# Altium PCB Tx_555_PCB.PcbDoc
Units mm, origin at the board's own origin, x right, y up, seen from the top; angles counter-clockwise.
Board outline 75 x 50 mm, 2 copper layers (Top Layer, Bottom Layer); 32 components, 15 nets, 77 pads, 0 vias.
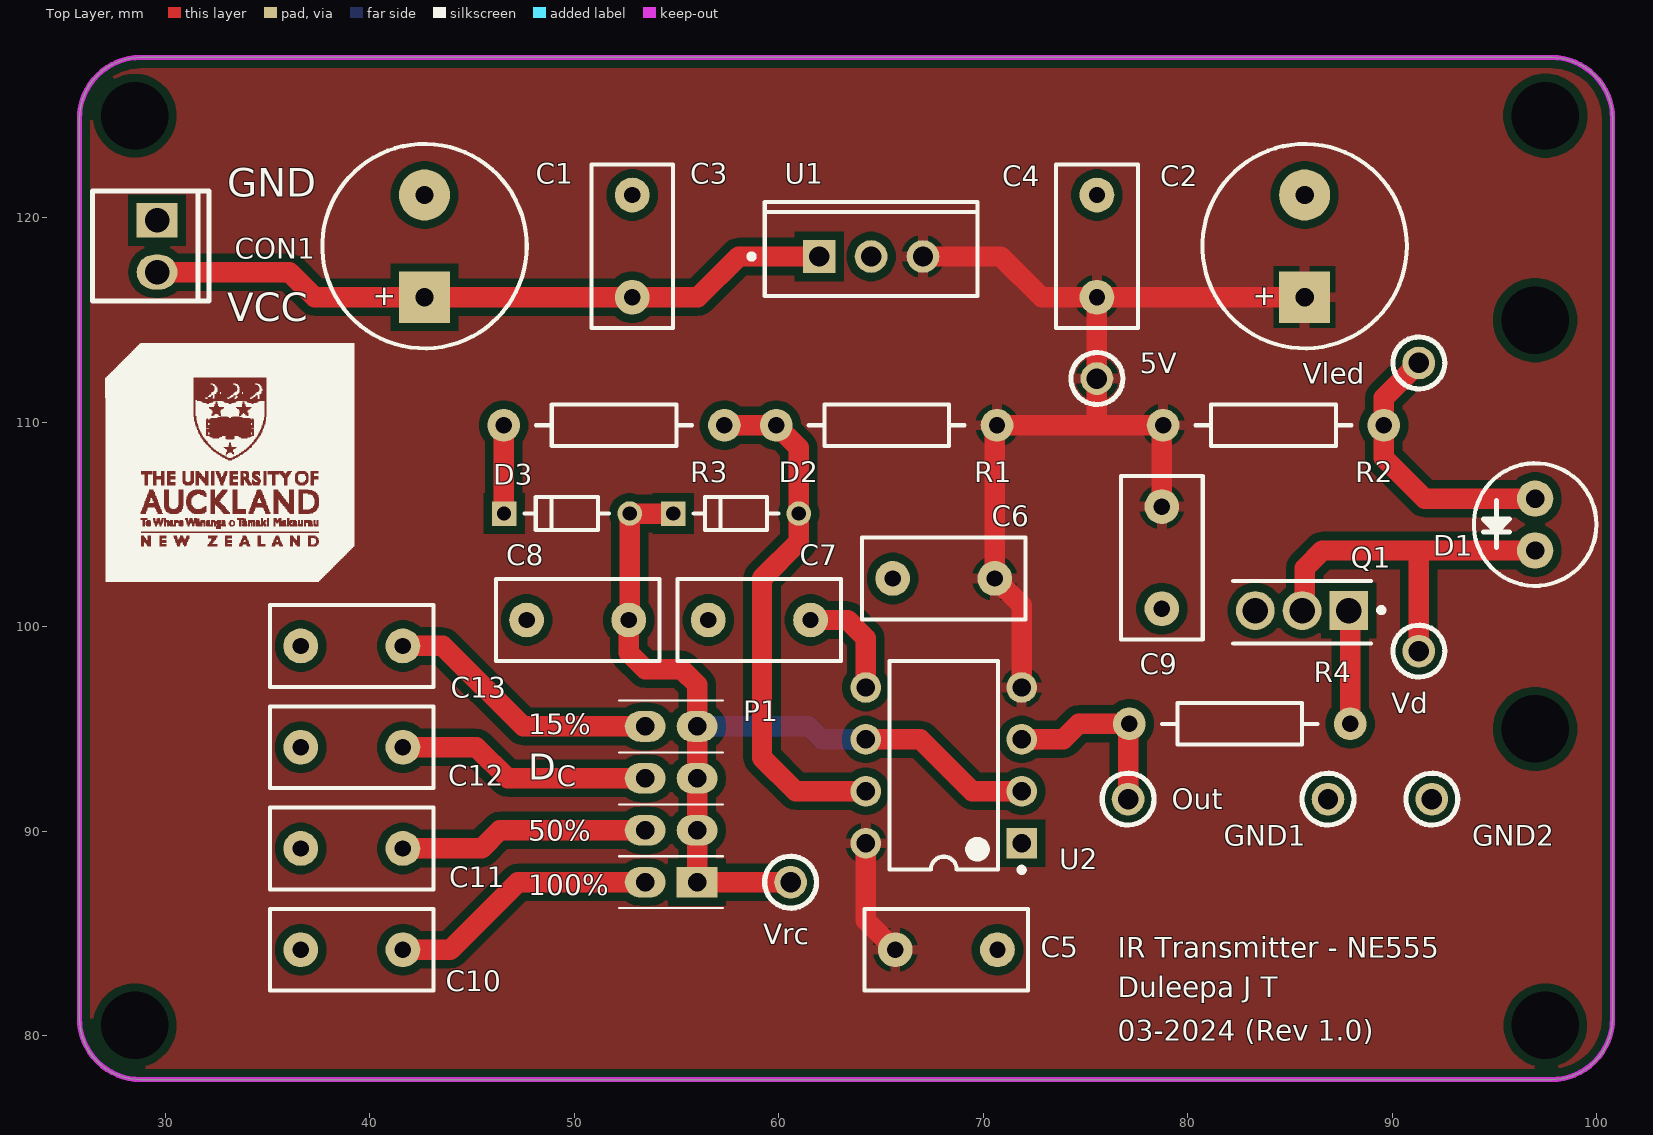
[diagram p0: Top Layer view]
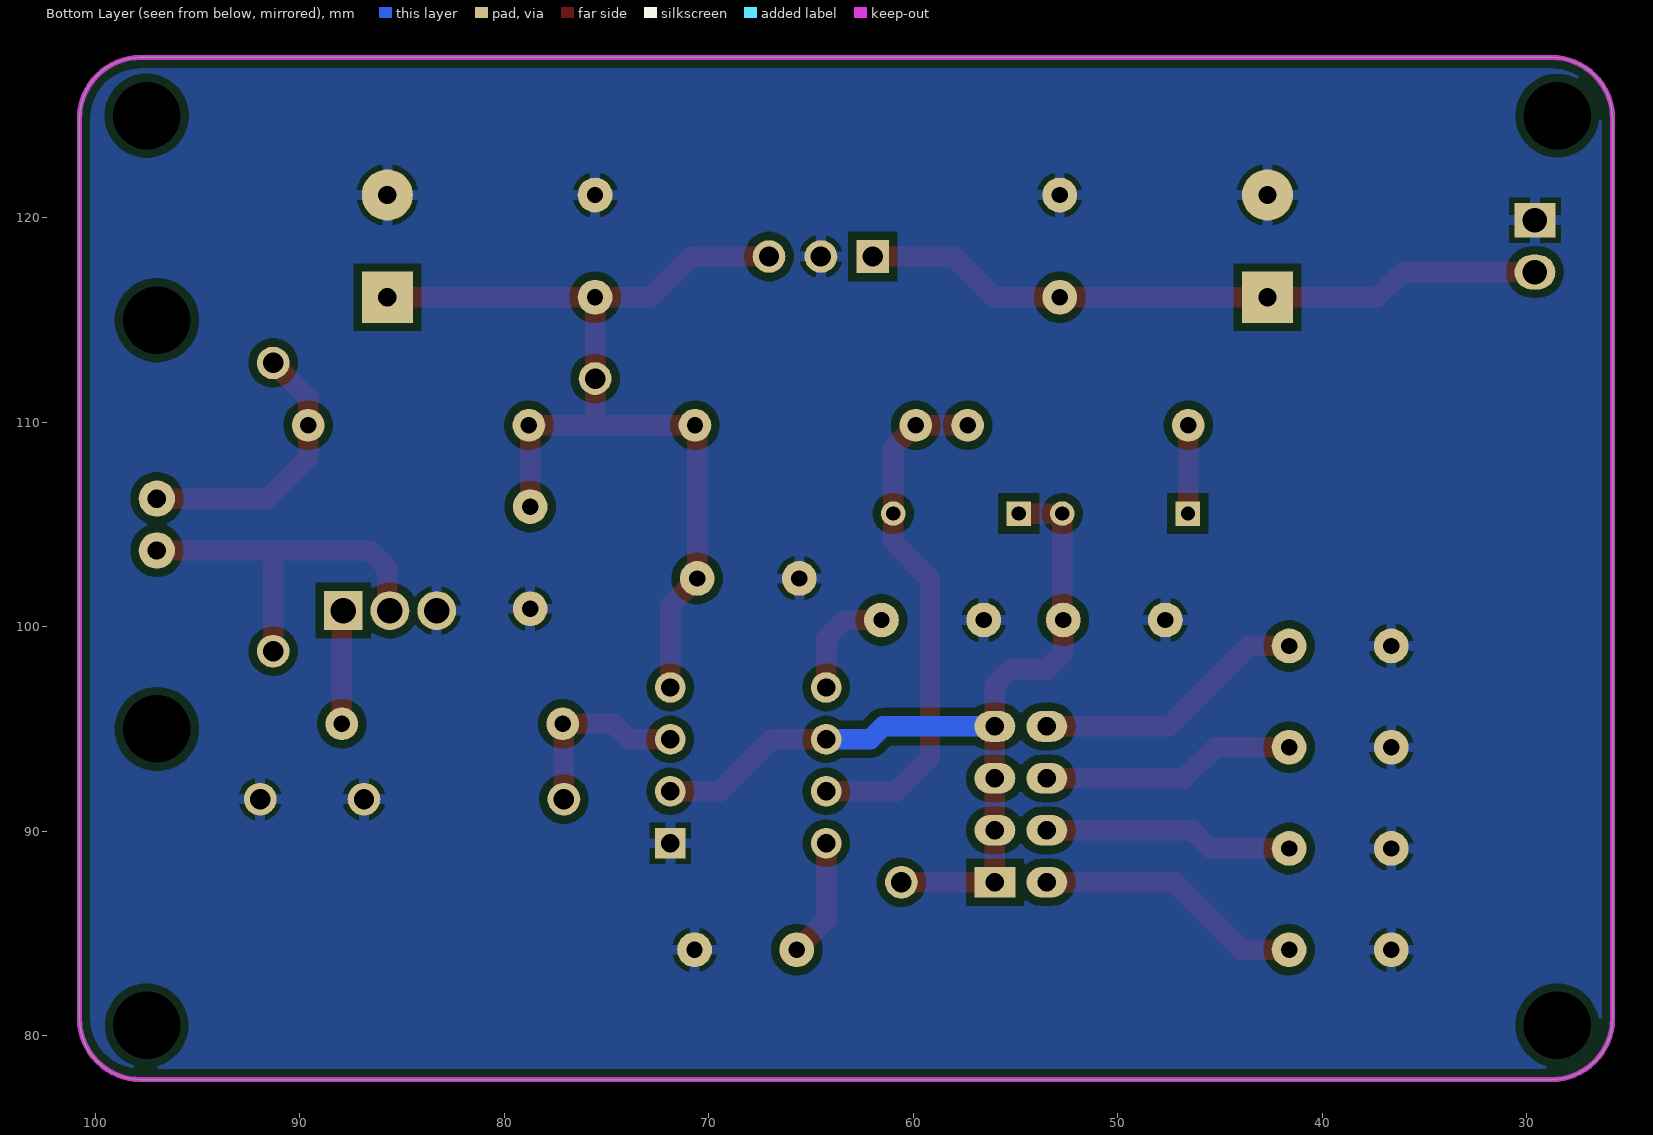
[diagram p1: Bottom Layer view, seen from below]
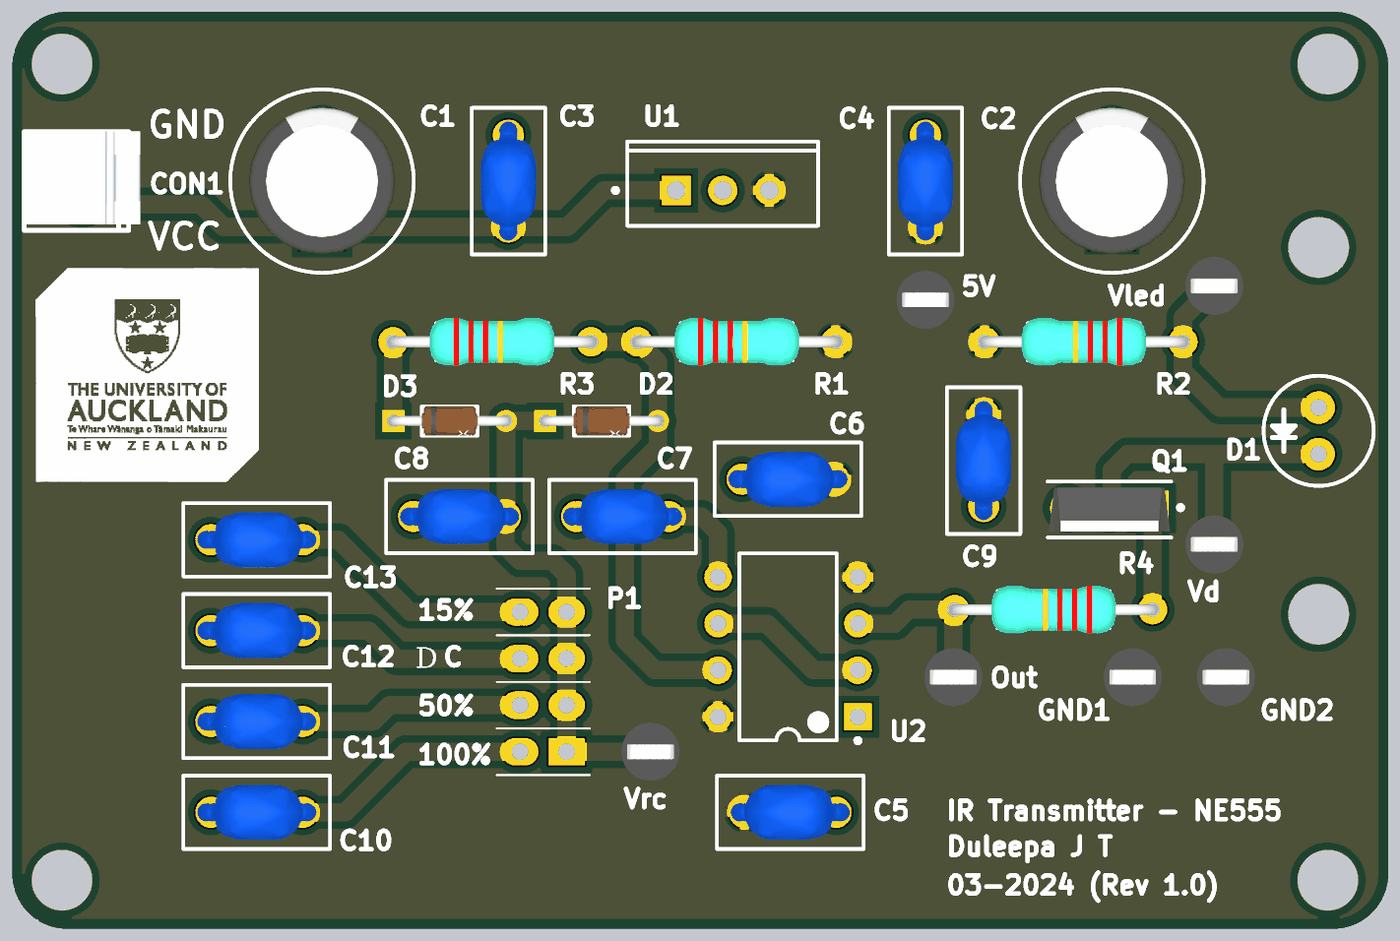
[diagram p2: 3D render of the assembled board from above, using the file's embedded part models]

## Layer stack, top to bottom
Top Solder: solder mask 0.0102, Solder Resist, Dk 3.5
Top Layer: signal copper 0.0356
Dielectric 1: dielectric 0.32, FR-4, Dk 4.8
Bottom Layer: signal copper 0.0356
Bottom Solder: solder mask 0.0102, Solder Resist, Dk 3.5

## Board outline
25.79,80.851 25.79,124.851 cw(c28.79,124.851) 28.79,127.851 97.79,127.851 cw(c97.79,124.851) 100.79,124.851 100.79,80.851 cw(c97.79,80.851) 97.79,77.851 28.79,77.851 cw(c28.79,80.851)

## Design rules (kind name [scope] priority, off if disabled: settings)
BoardOutlineClearance [All] p1: gap=0.3 ignorepadtopadclearanceinfootprint=FALSE except(0.4: Arc-SplitBarrior Arc-SplitContinuation Track-SplitBarrior Track-SplitContinuation SMDPad-SplitBarrior SMDPad-SplitContinuation THPad-SplitBarrior THPad-SplitContinuation Via-SplitBarrior Via-SplitContinuation Fill-SplitBarrior Fill-SplitContinuation Poly-SplitBarrior Poly-SplitContinuation Region-SplitBarrior Region-SplitContinuation Text-SplitBarrior Text-SplitContinuation)
Clearance [All] p1: gap=0.4 ignorepadtopadclearanceinfootprint=TRUE
Height [All] p1: minheight=0 maxheight=50 prefheight=12.7
HoleSize [All] p1: absolutevalues=TRUE maxlimit=12 minlimit=0.25 maxpercent=80.000 minpercent=20.000
MinimumAnnularRing [All] p1: minimumring=0.13
MinimumSolderMaskSliver [All] p1: minsoldermaskwidth=0.1
PolygonConnect PolygonConnect_1 [All] p1: thpad.connectstyle=Relief thpad.reliefconductorwidth=0.508 thpad.reliefentries=4 thpad.polygonreliefangle="90 Angle" thpad.airgapwidth=0.254 smdpad.connectstyle=Relief smdpad.reliefconductorwidth=0.508 smdpad.reliefentries=4 smdpad.polygonreliefangle="90 Angle" smdpad.airgapwidth=0.254 via.connectstyle=Direct via.reliefconductorwidth=0.508 via.reliefentries=4 via.polygonreliefangle="90 Angle" via.airgapwidth=0.254
RoutingCorners [All] p1: cornerstyle=Round minsetback=2.54 maxsetback=2.54
RoutingVias [All] p1: holewidth=0.4 width=0.65 viastyle="Through Hole" minholewidth=0.25 minwidth=0.4 maxholewidth=1 maxwidth=2
SilkToSilkClearance [All] p1: silktosilkclearance=0.1
SilkToSolderMaskClearance [IsPad] p1: minsilkscreentomaskgap=0.1 clearancetoexposedcopper=TRUE
SolderMaskExpansion [All] p1: expansion=0.102 istentingtop=FALSE
SupplyNets "Schematic Supply Nets_12" [InNet('Vled')] p1: voltage=0.000
SupplyNets "Schematic Supply Nets" [InNet('Vd')] p2: voltage=0.000
SupplyNets "Schematic Supply Nets_11" [InNet('Vc_25p')] p3: voltage=0.000
SupplyNets "Schematic Supply Nets_10" [InNet('Vc_100p')] p4: voltage=0.000
SupplyNets "Schematic Supply Nets_9" [InNet('GND')] p5: voltage=0.000
SupplyNets "Schematic Supply Nets_8" [InNet('VCC')] p6: voltage=0.000
SupplyNets "Schematic Supply Nets_7" [InNet('Vc_75p')] p7: voltage=0.000
SupplyNets "Schematic Supply Nets_6" [InNet('5V')] p8: voltage=0.000
SupplyNets "Schematic Supply Nets_5" [InNet('Out')] p9: voltage=0.000
SupplyNets "Schematic Supply Nets_4" [InNet('DIS')] p10: voltage=0.000
SupplyNets "Schematic Supply Nets_3" [InNet('CNT')] p11: voltage=0.000
SupplyNets "Schematic Supply Nets_2" [InNet('Vc_50p')] p12: voltage=0.000
SupplyNets "Schematic Supply Nets_1" [InNet('Vrc')] p13: voltage=0.000
Width [All] p1: maxlimit=10.16 minlimit=0.127 preferedwidth=0.508
24 further rules are at their usual default settings.

## Components (designator, comment, footprint, x,y, rotation, side; value= is the part's Value field where it differs from the comment)
5V "TP TH" TP_TH_2.5mm 75.565,112.141 r0 top
C1 "ECAP" CR05 42.672,118.618 r90 top
C2 "ECAP" CR05 85.725,118.618 r90 top
C3 "CCAP_TH_5P0" CCAP_5P0 52.832,118.618 r270 top
C4 "CCAP_TH_5P0" CCAP_5P0 75.565,118.618 r270 top
C5 "CCAP_TH_5P0" CCAP_5P0 68.199,84.201 r180 top
C6 "CCAP_TH_5P0" CCAP_5P0 68.072,102.362 r0 top
C7 "CCAP_TH_5P0" CCAP_5P0 59.055,100.33 r0 top
C8 "CCAP_TH_5P0" CCAP_5P0 50.165,100.33 r0 top
C9 "CCAP_TH_5P0" CCAP_5P0 78.74,103.378 r90 top
C10 "CCAP_TH_5P0" CCAP_5P0 39.116,84.201 r0 top
C11 "CCAP_TH_5P0" CCAP_5P0 39.116,89.154 r0 top
C12 "CCAP_TH_5P0" CCAP_5P0 39.116,94.107 r0 top
C13 "CCAP_TH_5P0" CCAP_5P0 39.116,99.06 r0 top
CON1 "HDR2X1" HDR2X1_2P54 29.591,119.888 r0 top
D1 "LED_TH" TH_LED 97,105 r270 top
D2 "BAT85" FP-SOD68-MFG 57.912,105.537 r0 top
D3 "BAT85" FP-SOD68-MFG 49.635,105.537 r0 top
GND1 "TP TH" TP_TH_2.5mm 86.868,91.567 r0 top
GND2 "TP TH" TP_TH_2.5mm 91.948,91.567 r0 top
Out "TP TH" TP_TH_2.5mm 77.089,91.567 r0 top
P1 "HDR4X2" HDR4X2-2P54 56.007,87.503 r90 top
Q1 "IRLU024" FP-PG-TO251-3-MFG 85.598,100.711 r270 top
R1 "RESAX4" RAX4 65.278,109.855 r0 top
R2 "RESAX4" RAX4 84.201,109.855 r180 top
R3 "RESAX4" RAX4 51.943,109.855 r0 top
R4 "RESAX4" RAX4 82.55,95.25 r180 top
U1 "REG78M05" TO220_Reg 64.516,118.11 r90 top
U2 "NE555P" P0008A 68.072,93.218 r180 top
Vd "TP TH" TP_TH_2.5mm 91.313,98.806 r0 top
Vled "TP TH" TP_TH_2.5mm 91.313,112.903 r0 top
Vrc "TP TH" TP_TH_2.5mm 60.579,87.503 r0 top

## Footprints (in the part's own frame and the unit in brackets; to place one, negate y for a bottom-side part, rotate by r counter-clockwise, add the part's x,y. Pads: shape width x height; smd on the part's side, far side on the other; paste and mask are expansions set on the pad)
CCAP_5P0 [mm]
  round 1.7 hole 0.8: 1(-2.5,0) 2(2.5,0)
  silkscreen extent -4,-2 4,2, body extent -3.25,-1.5 3.25,1.5, height 6.5
CR05 [mm]
  rect 2.5x2.5 hole 0.9: 1(-2.5,0)
  round 2.5 hole 0.9: 2(2.5,0)
  silkscreen extent -5,-5 5,5, body extent -4,-3.99 4,3.99, height 11.5
FP-PG-TO251-3-MFG [mm]
  rect 1.9x1.9 hole 1.25 paste-2539.97 mask+0: 1(-0.08,2.286)
  round 1.9 hole 1.25 paste-2539.97 mask+0: 2(-0.08,0) 3(-0.08,-2.286)
  silkscreen extent -1.53,-3.36 1.53,4, body extent -1.39,-3.56 1.39,3.56, height 0.25
FP-SOD68-MFG [mm]
  rect 1.2x1.2 hole 0.7 paste-2539.97 mask+0: 1(-3.07,0)
  round 1.2 hole 0.7 paste-2539.97 mask+0: 2(3.07,0)
  silkscreen extent -2.07,-0.8 2.07,0.8, body extent -3.77,-0.9 3.77,0.9, height 0.25
HDR2X1_2P54 [mm] "Polarised Header 2 way"
  rect 2x1.7 hole 1.2: 1(0,0)
  oval 2x1.7 hole 1.2: 2(0,-2.54)
  silkscreen extent -3.16,-3.96 2.54,1.42, body extent -3.3,-3.64 3.18,1.44, height 10.09
HDR4X2-2P54 [mm]
  rect 1.5x2 hole 0.9: 1(0,0)
  oval 1.5x2 hole 0.9 paste-2539.97: 2(0,2.54)
  oval 1.5x2 hole 0.9: 3(2.54,0) 4(2.54,2.54) 5(5.08,0) 6(5.08,2.54) 7(7.62,0) 8(7.62,2.54)
  silkscreen extent -1.27,-1.27 8.89,3.81
P0008A [mm] "DIP, 8-Leads, Body 10.15x6.6mm, Pitch 2.54mm"
  rect 1.5x1.5 hole 0.9: 1(-3.81,3.81)
  round 1.5 hole 0.9: 2(-3.81,1.27) 3(-3.81,-1.27) 4(-3.81,-3.81) 5(3.81,-3.81) 6(3.81,-1.27) 7(3.81,1.27) 8(3.81,3.81)
  silkscreen extent -3.94,-5.1 2.65,5.23, body extent -3.95,-5.07 3.95,5.07, height 5.08
RAX4 [mm]
  round 1.6 hole 0.8: 1(-5.4,0) 2(5.4,0)
  silkscreen extent -3.81,-1.02 3.81,1.02, body extent -5.7,-1.3 5.7,1.3, height 2.7
TH_LED [mil]
  round 70 hole 35.43: 1(50,0) 2(-50,0)
  silkscreen extent -118,-118 118,118, body extent -98,-98 98,98, height 413
TO220_Reg [mm] "FM, 3-Leads, Body 10.03x8.98mm, Pitch 2.54mm"
  rect 1.6x1.6 hole 1: 1(0,2.54)
  round 1.6 hole 1: 3(0,-2.54) 4(0,0)
  silkscreen extent -1.93,-5.2 2.67,5.97, body extent -1.93,-5.2 2.67,5.2, height 20.75
TP_TH_2.5mm [mm] "Keystone through hole TP"
  round 1.6 hole 1: 1(0,0)
  silkscreen extent -1.27,-1.27 1.27,1.27, body extent -1.59,-1.59 1.59,1.59, height 5.59

## Part data
5V GND1 GND2 Out Vd Vled Vrc: library part CMP-046-000000-3, "Testpoint through hole / Keystone compact / 5000 - Red / 5001 - Black / 5002 - White / 5003 - Orange / 5004 - Yellow", Design Item ID="TP TH", Source="UoAPE_Connectors and Mechanical.SchLib"
C1 C2: library part CMP-003-000000-2, Design Item ID=ECAP, Source=CommonSymbols_V1.SchLib
C3 C4 C5 C6 C7 C8 C9 C10 C11 C12 C13: library part CMP-001-00023-1, "TH ceramic cap with 5mm pitch", Design Item ID=CCAP_5P0
CON1: library part CMP-004-000000-7, "Header 2X1", Design Item ID=HDR2X1, Source=CommonSymbols_V1.SchLib
D1: library part CMP-007-00002-1, "LED RED TH"
D2 D3: library part CMP-00011-1, "Rectifier Diode, Schottky, 1 Phase, 1 Element, 0.2A, 30V V(RRM), Silicon, DO-34", Case Connection=Isolated, Forward Voltage=800mV, Max Operating Temperature=125°C, Max Output current=200mA, Max Power Dissipation=200mW, Max Reverse Current=2uA, Min Operating Temperature=-55°C, Non-rep Pk Forward Current-Max=600mA, Package Body Material=Glass, Package Shape=Round, Package Style="LONG FORMMeter", Peak Reflow Temperature (Cel)=260°C, Rep Pk Reverse Voltage-Max=30V, Time @ Peak Reflow Temperature-Max (s)=40s, Diode Element Material=SILICON, Diode Type=RECTIFIER, JEDEC-95 Code=DO-34, JESD-30 Code=O-LALF-W2, JESD-609 Code=e3, Moisture Sensitivity Level=1, Number of Elements=1, Pins=2, Qualification Status="Not Qualified", Reach SVHC Compliant=Yes, Reverse Recovery Time-Max=0.004us, RoHS Compliant=Yes, Surface Mount=No, Technology=SCHOTTKY, Terminal Finish=Tin, Terminal Form=Wire, Terminal Position=AXIAL
P1: library part CMP-002-00015-5, "Header, 8-Pin, Dual row", Design Item ID=HDR3X2, Source=CommonSymbols_V1.SchLib
Q1: library part CMP-013-00004-1, "Power Field-Effect Transistor, 80A I(D), 75V, 0.009ohm, 1-Element, N-Channel, Silicon, Metal-oxide Semiconductor FET, TO-251AA", Avalanche Energy Rating (Eas)=120mJ, Case Connection=DRAIN, Drain Current-Max (Abs) (ID)=80A, Drain-source On Resistance-Max=9mR, DS Breakdown Voltage-Min=75V, Max Operating Temperature=175°C, Operating Mode="ENHANCEMENT MODE", Package Body Material=Plastic, Package Shape=Rectangular, Package Style=IN-LINEMeter, Peak Reflow Temperature (Cel)=260°C, Power Dissipation-Max (Abs)=140W, Pulsed Drain Current-Max (IDM)=310A, Time @ Peak Reflow Temperature-Max (s)=30s, Drain Current-Max (ID)=80A, FET Technology="METAL-OXIDE SEMICONDUCTOR", JEDEC-95 Code=TO-251AA, JESD-30 Code=R-PSIP-T3, JESD-609 Code=e3, Moisture Sensitivity Level=1, Number of Elements=1, Pins=3, Polarity/Channel Type=N-CHANNEL, Qualification Status="Not Qualified", Reach SVHC Compliant=Yes, RoHS Compliant=Yes, Surface Mount=No, Terminal Finish=Nickel, Terminal Form="Through Hole", Terminal Position=SINGLE, Transistor Application=SWITCHING, Transistor Element Material=SILICON
R1 R2 R3 R4: library part CMP-010-000001-2, "Axial Resistor", Design Item ID=RESAX4, Source=CommonSymbols_V1.SchLib
U1: library part CMP-011-000018-2, "78M Series Linear Regulators", Design Item ID=REG78MXX, Source=CommonSymbols_V1.SchLib
U2: library part CMP-00023-00000-1, "1 Func, BIPolar, PDIP8", Case/Package=DIP, Max Operating Temperature=70°C, Max Supply Voltage=16V, Min Operating Temperature=0°C, Min Supply Voltage=4.5V, Nominal Supply Voltage=5V, Package Body Material=Plastic, Package Equivalence Code=DIP8,.3, Package Shape=Rectangular, Package Style=IN-LINEMeter, Power Supplies=5/15V, Temperature Grade=COMMERCIAL, Channels=1, Height - Seated (Max)=5.08mm, JESD-30 Code=R-PDIP-T8, JESD-609 Code=e3, Length=9.81mm, Pins=8, Qualification Status="Not Qualified", Reach SVHC Compliant=Yes, RoHS Compliant=Yes, Surface Mount=No, Technology=BIPOLAR, Terminal Finish=Tin, Terminal Form="Through Hole", Terminal Pitch=2.54mm, Terminal Position=DUAL, Throw Configuration="PULSE; RECTANGULAR", Width=7.62mm

## Free pads (board coordinates)
  round 1.524 hole 3.3: 9(28.5,80.5) 9(28.5,125) 9(97,95) 9(97,115) 9(97.5,80.5) 9(97.5,125)

## Nets (pads, with @x,y where several pads share a name; then routed paths per layer and width w, separated by ;. In a path a pad name is that pad's centre, name@x,y a point inside that pad or via, vN(x,y) a via of type N, cw(c..) or ccw(c..) an arc to the next point about the centre after c; other vN are vias at no path point)
5V: 5V.1 C2.1 C4.2 C5.2 C6.2 C9.2 R1.2 R2.2 U1.3 U2.4 U2.8 | length 57.1
  Top Layer w1: U2.8 64.262,85.638 C5.2 ; U1.3 70.866,118.11 72.858,116.118 C4.2 ; U2.4 71.882,101.052 C6.2 70.572,109.749 R1.2 75.565,109.855 ; C9.2 78.74,109.794 R2.2 75.565,109.855 ; C2.1 C4.2 ; 75.565,109.855 5V.1 C4.2
CNT: C7.2 U2.5 | length 5.5
  Top Layer w1: C7.2 63.373,100.33 64.262,99.441 U2.5
DIS: D2.2 R1.1 R3.2 U2.7 | length 25.8
  Top Layer w1: R3.2 R1.1 60.982,108.751 D2.2 60.982,104.162 59.182,102.362 59.182,93.599 60.833,91.948 U2.7
GND: C1.2 C2.2 C3.1 C4.1 C5.1 C6.1 C7.1 C8.1 C9.1 C10.1 C11.1 C12.1 C13.1 CON1.1 GND1.1 GND2.1 Q1.3 U1.4 U2.1
NetD3_1: D3.1 R3.1 | length 4.3
  Top Layer w1: R3.1 46.543,105.559 D3.1
NetQ1_1: Q1.1 R4.1 | length 5.6
  Top Layer w1: Q1.1 87.95,100.725 R4.1
Out: Out.1 R4.2 U2.3 | length 9.3
  Top Layer w1: U2.3 73.914,94.488 74.676,95.25 R4.2 77.089,95.189 Out.1
Vc_25p: C13.2 P1.8 | length 13.5
  Top Layer w1: C13.2 43.561,99.06 47.498,95.123 P1.8
Vc_50p: C12.2 P1.6 | length 12.5
  Top Layer w1: C12.2 45.212,94.107 46.736,92.583 P1.6
Vc_75p: C11.2 P1.4 | length 12.2
  Top Layer w1: C11.2 45.466,89.154 46.355,90.043 P1.4
Vc_100p: C10.2 P1.2 | length 13.2
  Top Layer w1: C10.2 43.942,84.201 47.244,87.503 P1.2
VCC: C1.1 C3.2 CON1.2 U1.1 | length 33.7
  Top Layer w1: CON1.2 36.068,117.348 37.298,116.118 C1.1 C3.2 56.047,116.118 58.039,118.11 U1.1
Vd: D1.1 Q1.2 Vd.1 | length 18.7
  Top Layer w1: Q1.2 85.725,100.918 85.725,102.87 86.585,103.73 91.44,103.73 ; Vd.1 91.313,103.603 91.44,103.73 ; D1.1 91.44,103.73
Vled: D1.2 R2.1 Vled.1 | length 13.6
  Top Layer w1: Vled.1 89.601,111.191 R2.1 89.601,108.265 91.596,106.27 D1.2
Vrc: C8.2 D2.1 D3.2 P1.1 P1.3 P1.5 P1.7 U2.2 U2.6 Vrc.1 | length 44.4
  Top Layer w1: D2.1 D3.2 52.705,100.37 C8.2 52.665,98.719 53.467,97.917 55.245,97.917 56.007,97.155 P1.7 P1.5 P1.3 P1.1 Vrc.1 ; U2.6 66.929,94.488 69.469,91.948 U2.2
  Bottom Layer w1: P1.7 61.468,95.123 62.103,94.488 U2.6

## Polygon pours and split planes (outlines as drawn)
GND on Bottom Layer "GND_L02_P000" (solid, pour order 0): 25.79,127.889 100.79,127.889 100.79,77.851 25.79,77.851
5V on Top Layer "5V_L01_P001" (solid, pour order 1): 25.79,127.889 100.79,127.889 100.79,77.851 25.79,77.851

## Keep-outs
Keep-Out Layer:
  the board outline again, w0.254

## Silkscreen, mask and mechanical layers (free items; w line width, h text height)
Top Overlay:
  drawing of 24 lines, arcs and shapes, not listed
  text "GND" at 33.02,121.031 h1.4
  text "VCC" at 33.02,114.935 h1.4
  text "15%" at 47.752,94.742 h1
  text "C" at 49.149,92.202 h1
  text "D" at 47.752,92.075 h2.2
  text "50%" at 47.752,89.535 h1
  text "100%" at 47.752,86.868 h1
  text "IR Transmitter - NE555" at 76.581,83.82 h1
  text "Duleepa J T" at 76.581,81.867 h1
  text "03-2024 (Rev 1.0)" at 76.581,79.756 h1
Mechanical 1:
  the board outline again, w0.254

## Text inside footprints (layer, text, board x,y; h text height)
C1: Top Overlay "+" at 41.148,115.57 h1 r90
C2: Top Overlay "+" at 84.201,115.57 h1 r90